# Altium PCB Sequential LEDs.PcbDoc
Units mm, origin at the board's own origin, x right, y up, seen from the top; angles counter-clockwise.
Board outline 66.55 x 30.1 mm, 2 copper layers (Top Layer, Bottom Layer), stack 1.671 mm thick; 28 components, 26 nets, 77 pads, 19 vias.
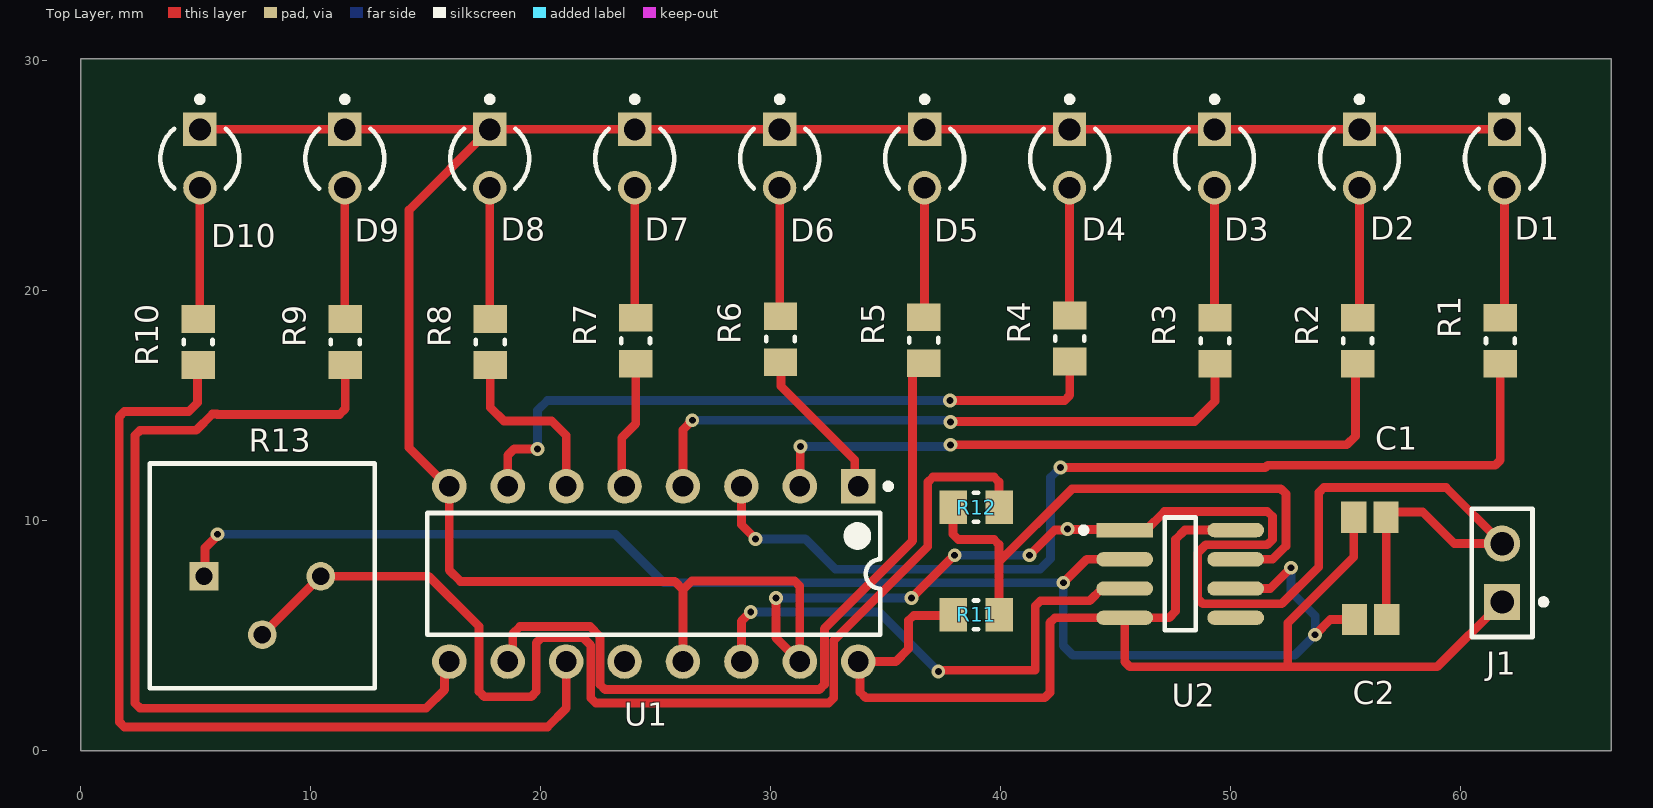
[diagram p0: Top Layer view]
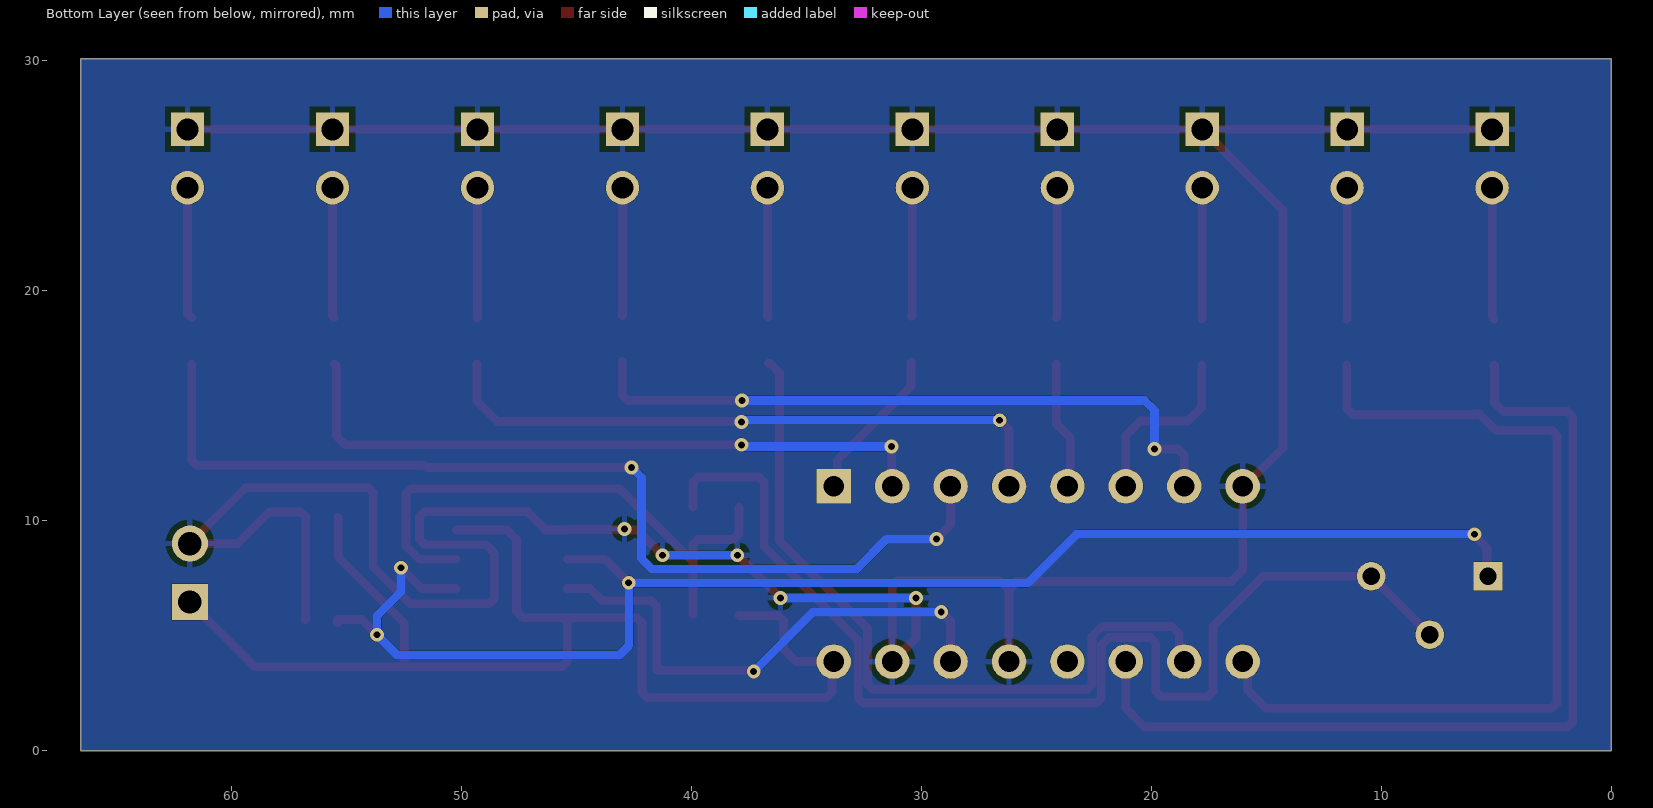
[diagram p1: Bottom Layer view, seen from below]
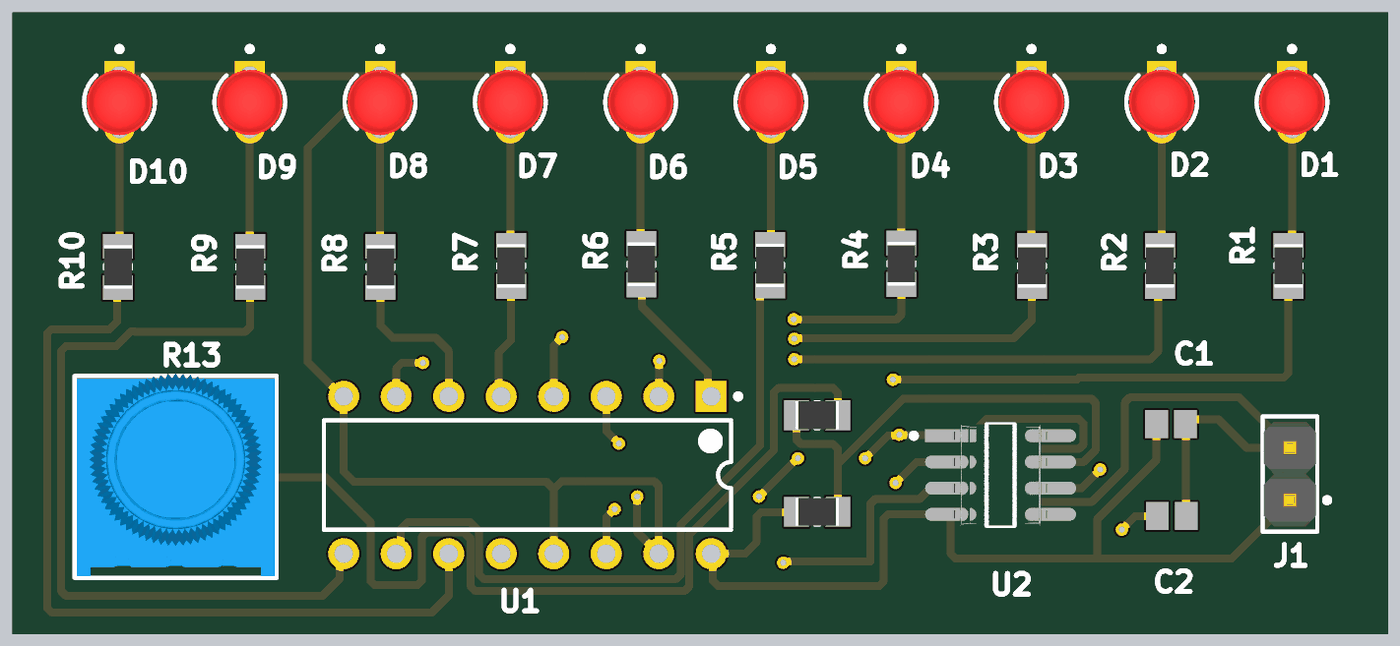
[diagram p2: 3D render of the assembled board from above, using the file's embedded part models]

## Layer stack, top to bottom
Top Solder: solder mask 0.0102, Solder Resist, Dk 3.5
Top Layer: signal copper 0.0356
Dielectric 1: dielectric 1.6, FR-4, Dk 4.8
Bottom Layer: signal copper 0.0356
Bottom Solder: solder mask 0.0102, Solder Resist, Dk 3.5

## Board outline
0,0 66.548,0 66.548,30.099 0,30.099

## Design rules (kind name [scope] priority, off if disabled: settings)
Clearance Clearance_1 [All] p1: gap=0 ignorepadtopadclearanceinfootprint=FALSE
Clearance Clearance_1 [OnMid vs OnMid] p2: gap=0.254 ignorepadtopadclearanceinfootprint=FALSE sourcerule=39 cellrowname=All cellrowtype=0 cellcolname=All cellcoltype=0 innerlayers=TRUE
Clearance Clearance_2 [(ExistsOnLayer('Top Layer') Or ExistsOnLayer('Bottom Layer')) vs (ExistsOnLayer('Top Layer') Or ExistsOnLayer('Bottom Layer'))] p3: gap=0.254 ignorepadtopadclearanceinfootprint=FALSE sourcerule=39 cellrowname=All cellrowtype=0 cellcolname=All cellcoltype=0 outerlayers=TRUE
Clearance [All] p4: gap=0.254 ignorepadtopadclearanceinfootprint=FALSE ismatrix=TRUE
MinimumSolderMaskSliver [All] p1: minsoldermaskwidth=0
PolygonConnect [All] p1: connectstyle=Relief reliefconductorwidth=0.254 reliefentries=4 polygonreliefangle="90 Angle" airgapwidth=0.254
RoutingVias RoutingViaStyle_1 [All] p1: holewidth=0.1 width=0.6 viastyle="Through Hole" minholewidth=0.1 minwidth=0.6 maxholewidth=0.1 maxwidth=0.6
RoutingVias [All] p2: holewidth=0.711 width=1.27 viastyle="Through Hole" minholewidth=0.711 minwidth=1.27 maxholewidth=0.711 maxwidth=1.27
SilkToSolderMaskClearance [IsPad] p1: minsilkscreentomaskgap=0.1 clearancetoexposedcopper=TRUE
SolderMaskExpansion [All] p1: expansion=0.102 istentingtop=FALSE
UnRoutedNet [All] p1: checkbadconnections=TRUE
Width MaxMinWidth_1 [All] p1: maxlimit=1 minlimit=0.1 preferedwidth=0.5 minimp=50.000000 maximp=50.000000 favimp=50.000000
Width [All] p2: maxlimit=0.254 minlimit=0.254 preferedwidth=0.254
27 further rules are at their usual default settings.

## Components (designator, comment, footprint, x,y, rotation, side; value= is the part's Value field where it differs from the comment)
C1 "C0805C105K3RACTU" CAPC2013X140X50LL20T25 56.047,10.16 r180 top
C2 "C0805C105K3RACTU" CAPC2013X140X50LL20T25 56.083,5.715 r180 top
D1 "HLMP-1301" FP-HLMP-1301-MFG 61.9,25.756 r270 top
D2 "HLMP-1301" FP-HLMP-1301-MFG 55.598,25.756 r270 top
D3 "HLMP-1301" FP-HLMP-1301-MFG 49.296,25.756 r270 top
D4 "HLMP-1301" FP-HLMP-1301-MFG 42.994,25.756 r270 top
D5 "HLMP-1301" FP-HLMP-1301-MFG 36.692,25.756 r270 top
D6 "HLMP-1301" FP-HLMP-1301-MFG 30.39,25.756 r270 top
D7 "HLMP-1301" FP-HLMP-1301-MFG 24.088,25.756 r270 top
D8 "HLMP-1301" FP-HLMP-1301-MFG 17.786,25.756 r270 top
D9 "HLMP-1301" FP-HLMP-1301-MFG 11.484,25.756 r270 top
D10 "HLMP-1301" FP-HLMP-1301-MFG 5.182,25.756 r270 top
J1 "M20-9990245" FP-M20-9990245-MFG 61.798,7.747 r90 top
R1 "RC0805FR-071KL" RESC2013X60X35ML10T20 61.722,17.831 r90 top
R2 "RC0805FR-071KL" RESC2013X60X35ML10T20 55.519,17.831 r90 top
R3 "RC0805FR-071KL" RESC2013X60X35ML10T20 49.316,17.831 r90 top
R4 "RC0805FR-071KL" RESC2013X60X35ML10T20 43.002,17.932 r90 top
R5 "RC0805FR-071KL" RESC2013X60X35ML10T20 36.652,17.856 r90 top
R6 "RC0805FR-071KL" RESC2013X60X35ML10T20 30.429,17.907 r90 top
R7 "RC0805FR-071KL" RESC2013X60X35ML10T20 24.13,17.831 r90 top
R8 "RC0805FR-071KL" RESC2013X60X35ML10T20 17.805,17.78 r90 top
R9 "RC0805FR-071KL" RESC2013X60X35ML10T20 11.506,17.78 r90 top
R10 "RC0805FR-071KL" RESC2013X60X35ML10T20 5.105,17.78 r90 top
R11 "RC0805FR-071KL" RESC2013X60X35ML10T20 38.929,5.918 r180 top
R12 "RC0805FR-071KL" RESC2013X60X35ML10T20 38.929,10.593 r180 top
R13 "3386P-1-105TLF" FP-3386P-MFG 7.899,7.61 r0 top value=1MΩ
U1 "CD4017BE" N0016A 24.917,7.696 r270 top
U2 "NE555DR" FP-D0008A-IPC_A 47.803,7.696 r0 top

## Footprints (in the part's own frame and the unit in brackets; to place one, negate y for a bottom-side part, rotate by r counter-clockwise, add the part's x,y. Pads: shape width x height; smd on the part's side, far side on the other; paste and mask are expansions set on the pad)
CAPC2013X140X50LL20T25 [mm] "Chip Capacitor, 2-Leads, Body 2.00x1.25mm, IPC High Density"
  rect 1.1x1.35 smd: 1(-0.7,0) 2(0.7,0)
  body extent -1.1,-0.72 1.1,0.72, height 1.4
FP-3386P-MFG [mm]
  rect 1.25x1.25 hole 0.75 paste-2539.97 mask+0: 1(-2.54,-0.015)
  round 1.25 hole 0.75 paste-2539.97 mask+0: 2(0,-2.555) 3(2.54,-0.015)
  silkscreen extent -4.89,-4.89 4.89,4.89, body extent -4.99,-4.99 4.99,4.99, height 0.25
FP-D0008A-IPC_A [mm]
  rect 2.469x0.622 smd paste+0 mask+0: 1(-2.414,1.905)
  rrect100% 2.469x0.622 smd paste+0 mask+0: 2(-2.414,0.635) 3(-2.414,-0.635) 4(-2.414,-1.905) 5(2.414,-1.905) 6(2.414,-0.635) 7(2.414,0.635) 8(2.414,1.905)
  silkscreen extent -4.32,-2.45 0.68,2.45, body extent -4.15,-2.95 4.15,2.95, height 0.25
FP-HLMP-1301-MFG [mm]
  rect 1.45x1.45 hole 0.95 paste-2539.97 mask+0: 1(-1.27,0)
  round 1.45 hole 0.95 paste-2539.97 mask+0: 2(1.27,0)
  silkscreen extent -2.7,-1.71 1.3,1.71, body extent -2.22,-2.22 2.22,2.22, height 0.25
FP-M20-9990245-MFG [mm]
  rect 1.57x1.57 hole 1.02 paste-2539.97 mask+0: 1(-1.27,0)
  round 1.57 hole 1.02 paste-2539.97 mask+0: 2(1.27,0)
  silkscreen extent -2.79,-1.92 2.79,1.32, body extent -2.89,-1.42 2.89,1.42, height 0.25
N0016A [mm] "DIP, 16-Leads, Body 19.7x6.6mm, Pitch 2.54mm"
  rect 1.5x1.5 hole 0.9: 1(-3.81,8.89)
  round 1.5 hole 0.9: 2(-3.81,6.35) 3(-3.81,3.81) 4(-3.81,1.27) 5(-3.81,-1.27) 6(-3.81,-3.81) 7(-3.81,-6.35) 8(-3.81,-8.89) 9(3.81,-8.89) 10(3.81,-6.35) 11(3.81,-3.81) 12(3.81,-1.27) 13(3.81,1.27) 14(3.81,3.81) 15(3.81,6.35) 16(3.81,8.89)
  silkscreen extent -3.93,-9.85 2.65,10.32, body extent -3.95,-9.85 3.95,9.85, height 5.08
RESC2013X60X35ML10T20 [mm] "Chip Resistor, 2-Leads, Body 2.1x1.35mm, IPC Low Density"
  rect 1.2x1.45 smd: 1(-1,0) 2(1,0)
  silkscreen extent -0.1,-0.62 0.1,0.62, body extent -1.05,-0.68 1.05,0.67, height 0.6

## Part data
C1 C2: library part CMP-2007-03234-1, Manufacturer=Kemet, Part Number=C0805C105K3RACTU
D1 D2 D3 D4 D5 D6 D7 D8 D9 D10: library part CMP-18399-000007-1, "LED RED DIFFUSED T-1 T/H", Colour=Red, Forward Current=10mA, Forward Voltage=1.9V, Manufacturer=Broadcom, Max Junction Temp=+110°C, Package=0, Reverse Voltage=5V, Temperature="-40°C to +100°C", Temperature Range High=+100°C, Temperature Range Low=-40°C, Automotive=No, Category=Diode, ComponentLink2Description=Datasheet, ComponentLink2URL=https://docs.broadcom.com/docs/AV02-1555EN, Device Class L1=Optoelectronics, Device Class L2=LEDs, Device Class L3=unset, Digikey Description="LED RED DIFFUSED T-1 T/H", Lead Free=Yes, Led Orientation=Straight, Luminous Intensity=3.4mcd, Manufacturer Part Number=HLMP-1301, Mouser Description="Standard LEDs - Through Hole Red Diffused 635nm 3.4mcd", Octopart=https://octopart.com/hlmp-1301-broadcom-71130345, Peak Emmision Wavelength=635nm, RoHS=TRUE, Viewing Angle=60°, Wavelength=626nm
J1: library part CMP-15831-000105-1, "CONN HEADER VERT 2POS 2.54MM", Case/Package=SIL, Color=Black, Contact Resistance=25mR, Current=3A, Flammability Rating="UL94 V-0", Insulation Resistance=10GR, Max Operating Temperature=105°C, Min Operating Temperature=-40°C, Package Quantity=1000, Voltage=50V, Voltage Rating (AC)=750V, Connector Type="Male Pin", Contact Finish - Mating=GOLD, Contact Material=Brass, Contact Mating Length=0.24inch, Contact Plating=Gold, Contact Shape=Square, Contact Type="Male Pin", Current Rating=3A, Depth=2.54mm, Fastening Type=Pull, Gender=Male, Height=0.12inch, Housing Color=Black, Housing Material=Nylon, Insulation Color=Black, Insulation Material=Nylon, Lead Pitch=2.54mm, Length=5.08mm, Mated Stacking Heights=16.54mm, Mating Cycles=300, Max Current Rating=3A, Mount="Through Hole", Number of Contacts=2, Number of Poles=2, Number of Positions=2, Number of Rows=1, Orientation=Straight, Packaging=Bulk, Pitch=2.54mm, Radiation Hardening=No, Reach SVHC Compliant=Yes, Series=M20, Termination=Solder, Weight=0.25lb, Width=0.25inch, Working Voltage=750V
R1 R2 R3 R4 R5 R6 R7 R8 R9 R10 R11 R12: library part CMP-2100-03671-1, "Chip Resistor, 1 KOhm, +/- 1%, 125 mW, -55 to 155 degC, 0805 (2012 Metric), RoHS, Tape and Reel", Case Code (Imperial)=0805, Case Code (Metric)=2012, Manufacturer=Yageo, Max Operating Temperature=155degC, Max Power Dissipation=125mW, Min Operating Temperature=-55degC, Package Description="2-Pin Surface Mounted Device, Body 2 x 1.25 mm", Package Quantity=1, Resistance=1KOhm, Temperature Coefficient=100ppm/degreesC, Tolerance=1%, Voltage Rating=150V, Case/Package=0805, Composition=ThickFilm, Datasheet URL=http://www.yageo.com/NewPortal/yageodocoutput?fileName=/pdf/R-Chip/PYu-RC_Group_51_RoHS_L_5.pdf, Datasheet Version="Rev. 5, 10/2016", Depth=1.25mm, Height=0.024inch, Lead Free=LeadFree, Length=0.079inch, Manufacturer URL=http://www.yageo.com/, Military Standard=Not, Number of Pins=2, Number of Terminations=2, Package Reference=0805, Packaging=TapeandReel, Power Rating=125mW, REACH SVHC=Unknown, RoHSCompliant=true, Termination=SMD/SMT, Voltage Rating (DC)=150V, Width=0.049inch
R13: library part CMP-07234-000020-1, "TRIMMER 1M OHM 0.5W PC PIN TOP", Manufacturer="Bourns Inc.", Package=3386P, Power Rating=0.5W, Resistance=1MΩ, Temperature="-55°C to +125°C", Temperature Coefficient=100ppm/°C, Temperature Range High=+125°C, Temperature Range Low=-55°C, Tolerance=10%, Automotive=No, Category=Res, ComponentLink2Description=Datasheet, ComponentLink2URL=https://www.bourns.com/docs/Product-Datasheets/3386.pdf, Composition=Cermet, Device Class L1="Passive Components", Device Class L2=Resistors, Device Class L3="Variable Resistors and Potentiometers", Digikey Description="TRIMMER 1M OHM 0.5W PC PIN TOP", Height=5.08mm, Lead Free=Yes, Manufacturer Part Number=3386P-1-105TLF, Mouser Description="Trimmer Resistors - Through Hole 3/8 1Mohms 10% 0.5Watts Square", Octopart=https://octopart.com/3386p-1-105tlf-bourns-2025467, RoHS=TRUE, Series=3386, Standoff Height=0.38mm
U1: library part CMP-1623-00541-2, "CMOS Decade Counter with 10 Decoded Outputs, N0016A, TUBE", F @ Nom Voltage(Max)(Mhz)=8, Generic Part Number=CD4017B, ICC @ Nom Voltage(Max)(mA)=0.03, Manufacturer="Texas Instruments", Operating Temperature Range(C)="-55 to 125", Rating=Military, tpd @ Nom Voltage(Max)(ns)=270, Voltage(Nom)(V)=10, Bits(#)=10, Code_JEDEC=MS-001, DatasheetVersion=SCHS027C, Function=Counter, Input Type=CMOS, Inputs=1, Output Drive (IOL/IOH)(Max)(mA)=1.5/-1.5, Output Type=CMOS, PackageReference=N0016A, Schmitt Trigger=No, Technology Family=CD4000, Type=Decade, VCC(Max)(V)=18, VCC(Min)(V)=3
U2: library part CMP-1685-00007-2, "IC OSC SGL TIMER 100KHZ 8-SOIC", Case/Package=SOIC, Frequency=100kHz, High Level Output Current=-200mA, Low Level Output Current=200mA, Max Operating Temperature=70°C, Max Supply Voltage=16V, Min Operating Temperature=0°C, Min Supply Voltage=4.5V, Operating Supply Current=10mA, Package Quantity=2500, Quiescent Current=15mA, Contact Plating=Gold, Height=1.58mm, Lead Free="Lead Free", Length=4.9mm, Mount="Surface Mount", Number of Pins=8, Number of Timers/Counters=1, Packaging="Tape and Reel", Radiation Hardening=No, REACH SVHC="No SVHC", Weight=0.002561oz, Width=3.91mm

## Via types
v1: diameter 0.6, hole 0.3, Top Layer to Bottom Layer, 19 vias

## Nets (pads, with @x,y where several pads share a name; then routed paths per layer and width w, separated by ;. In a path a pad name is that pad's centre, name@x,y a point inside that pad or via, vN(x,y) a via of type N, cw(c..) or ccw(c..) an arc to the next point about the centre after c; other vN are vias at no path point)
DischNet: R11.1 R12.2 U2.7 | length 25
  Top Layer w0.381: R12.2 37.929,9.418 38.152,9.195 39.706,9.195 39.929,8.972 39.929,8.915 39.929,8.23 ; R11.1 39.929,8.23 ; U2.7 51.816,8.331 52.4,8.915 52.4,11.181 52.177,11.405 43.104,11.405 39.929,8.23
GND: C1.1 C2.1 D1.1 D2.1 D3.1 D4.1 D5.1 D6.1 D7.1 D8.1 D9.1 D10.1 J1.2 U1.8 U1.13 U1.15 U2.1 | length 162
  Top Layer w0.381: D10.1 D9.1 D8.1 ; U1.13@26.309,4.008 U1.13 26.187,7.016 ; v1@30.201,6.68 v1(30.226,6.655) 30.226,4.928 U1.15 31.267,7.168 31.044,7.391 26.563,7.391 26.187,7.016 ; v1(36.119,6.655) 36.131,6.655 37.986,8.509 v1(37.998,8.509) ; v1(41.25,8.509) 42.351,9.61 42.859,9.61 v1(42.901,9.652) 42.926,9.627 45.364,9.627 U2.1 46.313,9.601 47.126,10.414 51.593,10.414 51.816,10.191 51.816,9.189 51.593,8.966 48.92,8.966 48.565,8.611 48.565,6.624 48.788,6.401 52.222,6.401 53.823,8.001 53.823,11.232 54.046,11.455 59.36,11.455 J1.2 59.715,9.017 58.344,10.389 56.975,10.389 C1.1 56.765,10.142 56.765,5.733 C2.1 ; D1.1 D2.1 D3.1 D4.1 D5.1 D6.1 D7.1 D8.1 ; D8.1 14.275,23.515 14.275,13.183 15.951,11.506 U1.8 16.027,7.859 16.515,7.371 25.832,7.371 26.187,7.016
  Bottom Layer w0.381: v1(30.226,6.655) v1(36.119,6.655) ; v1(37.998,8.509) v1(41.25,8.509)
NetD1_2: D1.2 R1.2 | length 5.7
  Top Layer w0.381: R1.2 61.9,19.009 D1.2
NetD2_2: D2.2 R2.2 | length 5.7
  Top Layer w0.381: R2.2 55.598,18.91 D2.2
NetD3_2: D3.2 R3.2 | length 5.7
  Top Layer w0.381: D3.2 49.296,18.851 R3.2
NetD4_2: D4.2 R4.2 | length 5.6
  Top Layer w0.381: D4.2 42.994,18.941 R4.2
NetD5_2: D5.2 R5.2 | length 5.6
  Top Layer w0.381: R5.2 36.692,18.896 D5.2
NetD6_2: D6.2 R6.2 | length 5.6
  Top Layer w0.381: D6.2 30.39,18.947 R6.2
NetD7_2: D7.2 R7.2 | length 5.7
  Top Layer w0.381: D7.2 24.088,18.873 R7.2
NetD8_2: D8.2 R8.2 | length 5.7
  Top Layer w0.381: D8.2 17.786,18.8 R8.2
NetD9_2: D9.2 R9.2 | length 5.7
  Top Layer w0.381: D9.2 11.484,18.803 R9.2
NetD10_2: D10.2 R10.2 | length 5.7
  Top Layer w0.381: R10.2 5.182,18.856 D10.2
NetR1_1: R1.1 U1.3 | length 43.7
  Top Layer w0.381: U1.3 28.727,9.843 29.337,9.233 v1(29.337,9.22) ; v1(42.596,12.319) 51.505,12.319 51.607,12.421 61.499,12.421 61.722,12.644 R1.1
  Bottom Layer w0.381: v1(29.337,9.22) 31.496,9.22 32.817,7.899 41.707,7.899 42.165,8.358 42.165,11.888 v1(42.596,12.319)
NetR2_1: R2.1 U1.2 | length 29.2
  Top Layer w0.381: U1.2 31.28,11.519 31.28,13.221 v1(31.293,13.233) ; v1(37.821,13.31) 55.047,13.31 55.423,13.685 55.423,16.735 R2.1
  Bottom Layer w0.381: v1(31.293,13.233) 37.685,13.233 37.761,13.31 v1(37.821,13.31)
NetR3_1: R3.1 U1.4 | length 27.8
  Top Layer w0.381: U1.4 26.187,13.97 v1(26.594,14.376) ; v1(37.821,14.3) 37.846,14.326 48.438,14.326 49.316,15.203 R3.1
  Bottom Layer w0.381: v1(26.594,14.376) 37.685,14.376 37.761,14.3 v1(37.821,14.3)
NetR4_1: R4.1 U1.7 | length 29.3
  Top Layer w0.381: U1.7 18.567,12.852 18.847,13.132 v1(19.863,13.132) ; v1(37.795,15.24) 42.779,15.24 43.002,15.463 R4.1
  Bottom Layer w0.381: v1(19.863,13.132) 19.863,14.808 20.295,15.24 v1(37.795,15.24)
NetR5_1: R5.1 U1.10 | length 33.2
  Top Layer w0.381: U1.10 18.782,4.1 18.782,5.091 19.101,5.41 22.149,5.41 22.581,4.978 22.581,2.89 22.804,2.667 32.111,2.667 32.334,2.89 32.334,5.309 36.17,9.144 36.17,16.447 36.579,16.856 R5.1
NetR6_1: R6.1 U1.1 | length 6.8
  Top Layer w0.381: R6.1 30.447,16.889 30.447,15.857 33.655,12.649 33.655,11.659 U1.1
NetR7_1: R7.1 U1.5 | length 5.6
  Top Layer w0.381: U1.5 23.52,11.633 23.52,13.614 24.13,14.224 R7.1
NetR8_1: R8.1 U1.6 | length 7.9
  Top Layer w0.381: R8.1 17.805,14.935 18.39,14.351 20.472,14.351 21.107,13.716 U1.6
NetR9_1: R9.1 U1.9 | length 38.4
  Top Layer w0.381: R9.1 11.506,14.884 11.252,14.63 5.944,14.63 5.924,14.65 5.735,14.65 5.029,13.945 2.585,13.945 2.362,13.721 2.362,2.077 2.585,1.854 15.011,1.854 15.824,2.667 15.824,3.683 U1.9
NetR10_1: R10.1 U1.11 | length 40.5
  Top Layer w0.381: R10.1 5.08,16.755 5.08,15.138 4.699,14.757 1.9,14.757 1.676,14.534 1.676,1.265 1.9,1.041 20.295,1.041 21.107,1.854 U1.11
NetR12_1: R12.1 R13.2 R13.3 | length 50.1
  Top Layer w0.381: R13.2 R13.3 15.138,7.595 17.323,5.41 17.323,2.585 17.546,2.362 19.589,2.362 19.812,2.585 19.812,4.704 20.035,4.928 21.844,4.928 22.174,4.597 22.174,2.306 22.397,2.083 32.517,2.083 32.741,2.306 32.741,4.801 36.83,8.89 36.83,11.689 37.053,11.913 39.706,11.913 39.929,11.689 R12.1
NetU1_14: U1.14 U2.3 | length 22.8
  Top Layer w0.381: U1.14 28.727,5.639 v1(29.134,6.045) ; v1(37.287,3.454) 37.338,3.505 41.504,3.505 41.504,6.305 41.727,6.528 43.867,6.528 44.4,7.061 U2.3
  Bottom Layer w0.381: v1(29.134,6.045) 34.696,6.045 v1(37.287,3.454)
ThresNet: C2.2 R13.1 U2.2 U2.6 | length 65.3
  Top Layer w0.381: R13.1 5.41,7.645 5.41,8.831 5.944,9.364 v1(5.944,9.423) ; v1(42.723,7.315) 43.739,8.331 U2.2 ; U2.6 51.714,7.061 v1(52.619,7.966) ; v1(53.67,5.055) 54.331,5.715 C2.2 C2.2@55.383,5.59
  Bottom Layer w0.381: v1(5.944,9.423) 23.249,9.423 25.358,7.315 v1(42.723,7.315) 42.723,4.572 43.129,4.166 52.781,4.166 v1(53.67,5.055) 53.67,5.867 52.619,6.918 v1(52.619,7.966)
VCC: C1.2 J1.1 R11.2 U1.16 U2.4 U2.8 | length 57.4
  Top Layer w0.381: R11.2 37.903,5.893 36.215,5.893 35.992,5.67 35.992,4.445 35.433,3.886 U1.16 33.884,3.809 33.884,2.565 34.138,2.311 41.915,2.311 42.139,2.535 42.139,5.568 42.362,5.791 U2.4 ; U2.8 48.006,9.601 47.6,9.195 47.6,6.071 47.32,5.791 U2.4 ; C1.2 55.347,8.433 52.476,5.563 52.476,3.658 ; J1.1 58.979,3.658 52.476,3.658 ; U2.4 45.389,3.881 45.612,3.658 52.476,3.658
pads on no net: U1.12 U2.5

## Polygon pours and split planes (outlines as drawn)
GND on Bottom Layer "GND_Pour" (solid, pour order 0): 0,0 66.548,0 66.548,30.099 0,30.099